# Altium PCB PCBcirc1.PcbDoc
Units mm, origin at the board's own origin, x right, y up, seen from the top; angles counter-clockwise.
Board outline 100 x 50 mm, 2 copper layers (Top Layer, Bottom Layer); 34 components, 25 nets, 90 pads, 2 vias.
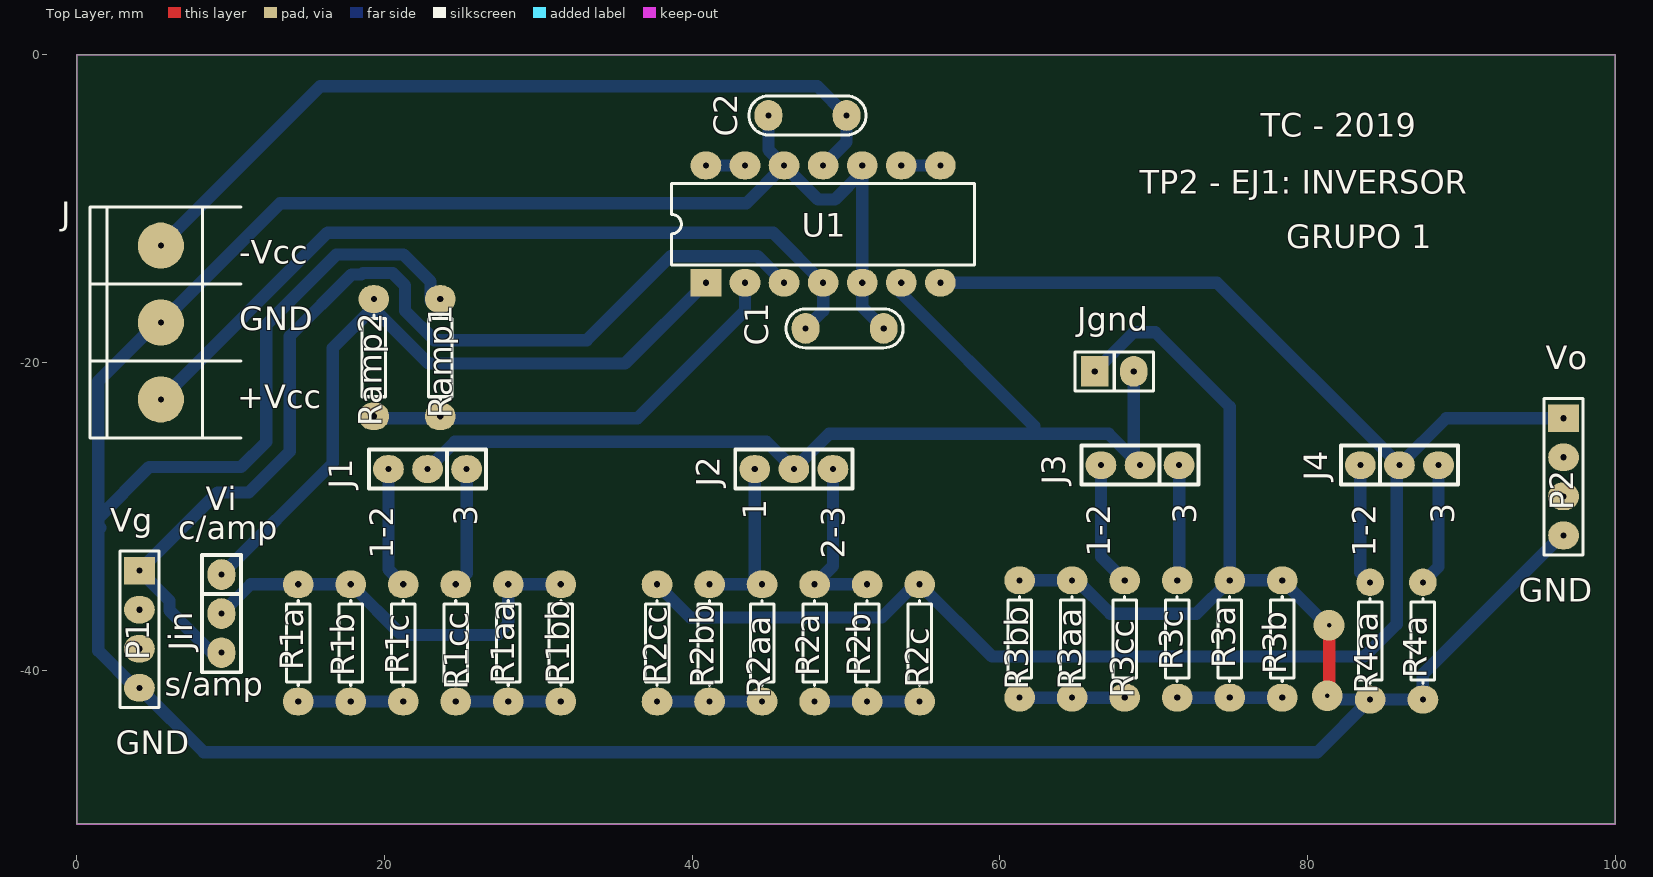
[diagram p0: Top Layer view]
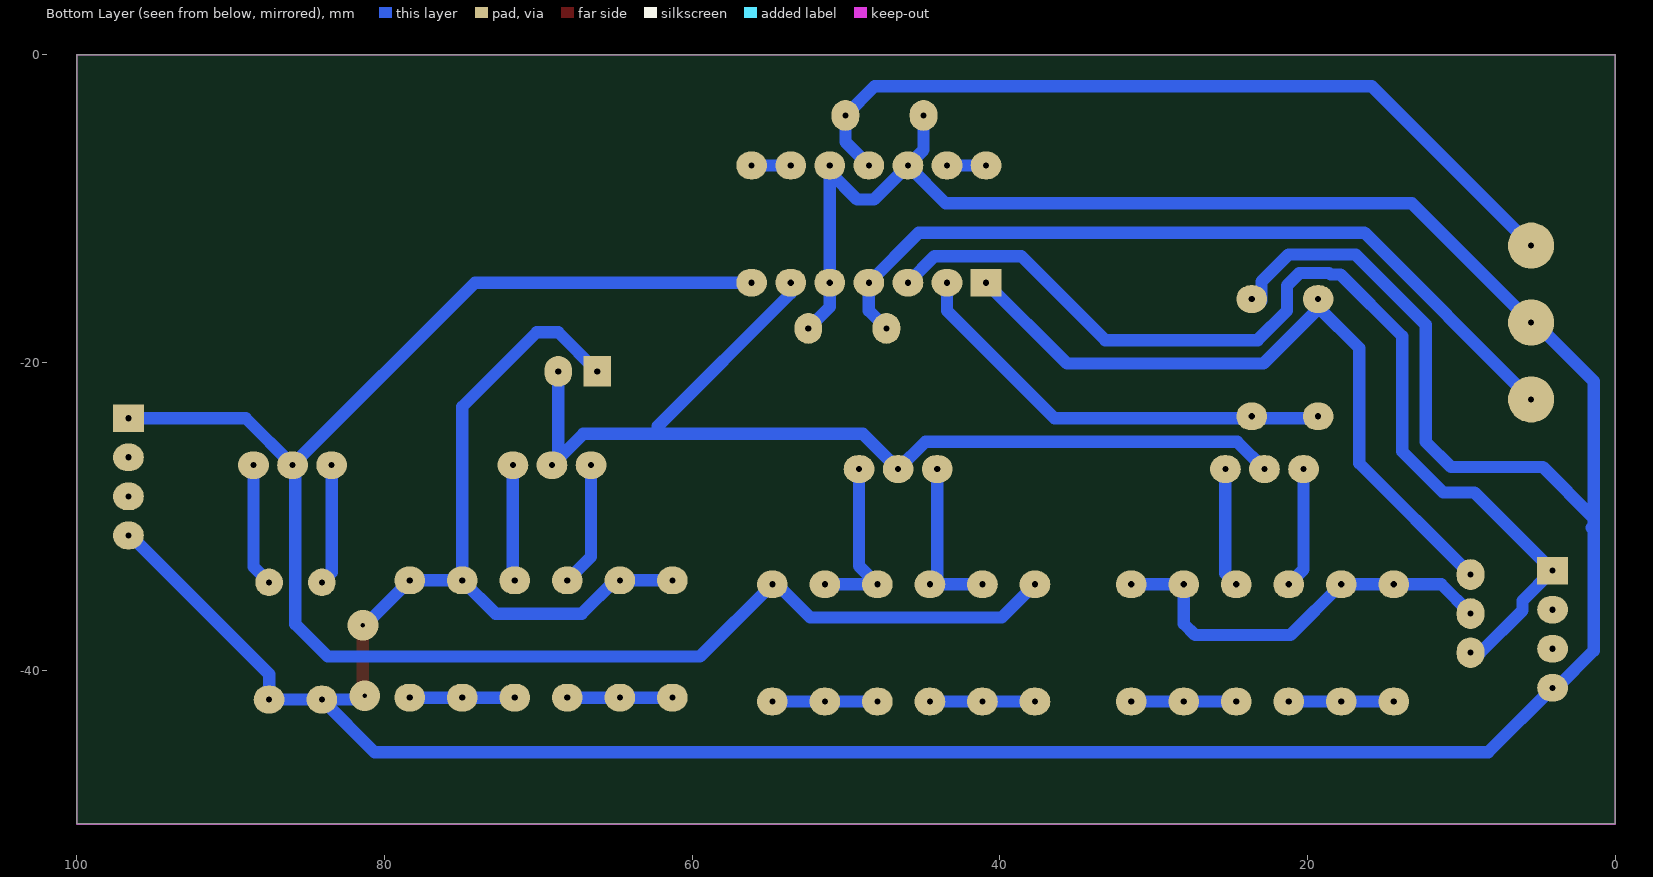
[diagram p1: Bottom Layer view, seen from below]

## Layer stack, top to bottom
Top Solder: solder mask 0.0102, Solder Resist, Dk 3.5
Top Layer: signal copper 0.0356
Dielectric 1: dielectric 0.32, FR-4, Dk 4.8
Bottom Layer: signal copper 0.0356
Bottom Solder: solder mask 0.0102, Solder Resist, Dk 3.5

## Board outline
0,0 100,0 100,-50 0,-50

## Design rules (kind name [scope] priority, off if disabled: settings)
Clearance [All] p1: gap=0.4 ignorepadtopadclearanceinfootprint=FALSE except(0: Arc-Hole Track-Hole SMDPad-Hole THPad-Hole Via-Hole Fill-Hole Poly-Hole Region-Hole Text-Hole)
PolygonConnect [All] p1: connectstyle=Relief reliefconductorwidth=0.254 reliefentries=4 polygonreliefangle="90 Angle" airgapwidth=0.254
RoutingVias [All] p1: holewidth=0.3 width=2 viastyle="Through Hole" minholewidth=0.3 minwidth=1.5 maxholewidth=0.5 maxwidth=2
SolderMaskExpansion [All] p1: expansion=0.102
Width [All] p1: maxlimit=0.9 minlimit=0.6 preferedwidth=0.8
30 further rules are at their usual default settings.

## Components (designator, comment, footprint, x,y, rotation, side; value= is the part's Value field where it differs from the comment)
C1 "CAP" CAP200 49.911,-17.78 r0 top
C2 "CAP" CAP200 47.498,-3.937 r180 top
J "ALIMENTACION" BORNERA3 5.461,-17.399 r0 top
J1 "JUMPER" JUMPER3TH 25.336,-26.924 r270 top
J2 "JUMPER" JUMPER3TH 49.149,-26.924 r270 top
J3 "JUMPER" JUMPER3TH 71.655,-26.67 r270 top
J4 "JUMPER" JUMPER3TH 83.439,-26.67 r90 top
Jgnd "JUMPER" JUMPER2 67.437,-20.574 r0 top
Jin "JUMPER" JUMPER3TH 9.398,-33.782 r0 top (schematic designator Ja)
P1 "Header 4" HDR1X4 4.064,-33.528 r270 top
P2 "Header 4" HDR1X4 96.647,-23.622 r270 top
R1a "Res1" AXIAL-0.3#1 14.388,-38.227 r270 top value=4.7K
R1aa "Res1" AXIAL-0.3#1 28.045,-38.227 r270 top value=4.7K
R1b "Res1" AXIAL-0.3#1 17.802,-38.227 r270 top value=4.7K
R1bb "Res1" AXIAL-0.3#1 31.459,-38.227 r270 top value=4.7K
R1c "Res1" AXIAL-0.3#1 21.216,-38.227 r90 top value=150
R1cc "Res1" AXIAL-0.3#1 24.631,-38.227 r90 top value=150
R2a "Res1" AXIAL-0.3#1 47.961,-38.227 r270 top value=47K
R2aa "Res1" AXIAL-0.3#1 44.547,-38.227 r270 top value=47K
R2b "Res1" AXIAL-0.3#1 51.375,-38.227 r270 top value=47K
R2bb "Res1" AXIAL-0.3#1 41.133,-38.227 r270 top value=47K
R2c "Res1" AXIAL-0.3#1 54.789,-38.227 r90 top value=1.5K
R2cc "Res1" AXIAL-0.3#1 37.719,-38.227 r90 top value=1.5K
R3a "Res1" AXIAL-0.3#1 74.945,-37.973 r270 top value=4.7K
R3aa "Res1" AXIAL-0.3#1 64.703,-37.973 r270 top value=4.7K
R3b "Res1" AXIAL-0.3#1 78.359,-37.973 r270 top value=4.7K
R3bb "Res1" AXIAL-0.3#1 61.289,-37.973 r270 top value=4.7K
R3c "Res1" AXIAL-0.3#1 71.531,-37.973 r90 top value=150
R3cc "Res1" AXIAL-0.3#1 68.117,-37.973 r90 top value=150
R4a "Res1" AXIAL-0.3#2 87.503,-38.1 r90 top value=10K
R4aa "Res1" AXIAL-0.3#2 84.074,-38.1 r90 top value=10K
Ramp1 "Res1" AXIAL-0.3#1 23.622,-19.685 r270 top value=x
Ramp2 "Res1" AXIAL-0.3#1 19.304,-19.685 r90 top value=x
U1 "LM324N" N014 48.514,-10.999 r0 top

## Footprints (in the part's own frame and the unit in brackets; to place one, negate y for a bottom-side part, rotate by r counter-clockwise, add the part's x,y. Pads: shape width x height; smd on the part's side, far side on the other; paste and mask are expansions set on the pad)
AXIAL-0.3#1 [mm] "Axial Device, Thru-Hole; 2 Leads; 0.3 in Pin Spacing"
  oval 1.8x2 hole 0.4: 1(-3.81,0) 2(3.81,0)
  silkscreen extent -2.77,-0.76 2.77,0.76
AXIAL-0.3#2 [mm] "Axial Device, Thru-Hole; 2 Leads; 0.3 in Pin Spacing"
  oval 1.8x2 hole 0.4: 1(-3.81,0)
  round 1.8 hole 0.4: 2(3.81,0)
  silkscreen extent -2.77,-0.76 2.77,0.76
BORNERA3 [mm] "Bornera con Tornillos 5mm separación"
  round 3 hole 0.4: 1(0,5) 2(0,0) 3(0,-5)
  silkscreen extent -4.6,-7.5 5.2,7.5, body extent -3.76,-7.39 3.94,8.11, height 10.05
CAP200 [mm]
  oval 1.8x2 hole 0.4: 1(-2.54,0) 2(2.54,0)
  silkscreen extent -3.81,-1.27 3.81,1.27, body extent -2.79,-1.17 2.79,1.12, height 6.24
HDR1X4 [mm] "Connector; Header; 4 Position"
  rect 1.8x2 hole 0.4: 1(0,0)
  oval 1.8x2 hole 0.4: 2(2.54,0) 3(5.08,0) 4(7.62,0)
  silkscreen extent -1.27,-1.27 8.89,1.27
JUMPER2 [mm]
  rect 1.8x2 hole 0.4: 1(-1.27,0)
  oval 1.8x2 hole 0.4: 2(1.27,0)
  silkscreen extent -2.54,-1.27 2.54,1.27, body extent -2.46,-1.27 2.54,1.27, height 9.5
JUMPER3TH [mm]
  oval 1.8x2 hole 0.4: 1(0,0) 2(0,-2.54) 3(0,-5.08)
  silkscreen extent -1.27,-6.35 1.27,1.27, body extent -1.24,-6.35 1.3,1.27, height 8.38
N014 [mm] "DIP; 14 Leads; Row Spacing 7.62 mm; Pitch 2.54 mm"
  rect 2x1.8 hole 0.4: 1(-7.62,-3.81)
  oval 2x1.8 hole 0.4: 2(-5.08,-3.81) 3(-2.54,-3.81) 4(0,-3.81) 5(2.54,-3.81) 6(5.08,-3.81) 7(7.62,-3.81) 8(7.62,3.81) 9(5.08,3.81) 10(2.54,3.81) 11(0,3.81) 12(-2.54,3.81) 13(-5.08,3.81) 14(-7.62,3.81)
  silkscreen extent -9.85,-2.65 9.85,2.65

## Part data
J: library part "BORNERA 3"
J1 J2 J3 J4 Jin: library part JUMPER3TH, "TIRA DE PINES 1x3"
P1 P2: "Header, 4-Pin", LatestRevisionDate=17-Jul-2002, LatestRevisionNote="Re-released for DXP Platform.", Publisher="Altium Limited"
R1a R1aa R1b R1bb R1c R1cc R2a R2aa R2b R2bb R2c R2cc R3a R3aa R3b R3bb R3c R3cc R4a R4aa Ramp1 Ramp2: "Resistor", LatestRevisionDate=17-Jul-2002, LatestRevisionNote="Re-released for DXP Platform.", PackageDescription="Axial Device, Thru-Hole; 2 Leads; 0.3 in Pin Spacing", PackageReference=AXIAL-0.3, Published=8-Jun-2000, Publisher="Altium Limited"
U1: "Quadruple Operational Amplifier", ComponentLink1Description="Manufacturer Link", ComponentLink1URL=http://www.ti.com/, ComponentLink2Description=Datasheet, ComponentLink2URL=http://www-s.ti.com/sc/ds/lm324.pdf, DatasheetVersion=Feb-1997, LatestRevisionDate=04-Mar-2005, LatestRevisionNote="Stylized 3D Model Added.", PackageDescription="DIP; 14 Leads; Row Spacing 7.62 mm; Pitch 2.54 mm", PackageReference=N014, PackageVersion=Oct-1995, Published=16-Jan-2001, Publisher="Altium Limited"

## Via types
v1: diameter 2, hole 0.3, Top Layer to Bottom Layer, 2 vias

## Nets (pads, with @x,y where several pads share a name; then routed paths per layer and width w, separated by ;. In a path a pad name is that pad's centre, name@x,y a point inside that pad or via, vN(x,y) a via of type N, cw(c..) or ccw(c..) an arc to the next point about the centre after c; other vN are vias at no path point)
+Vcc: C1.1 J.3 U1.4 | length 52.3
  Bottom Layer w0.8: J.3 16.303,-11.557 45.262,-11.557 U1.4 48.514,-16.637 C1.1
-Vcc: C2.1 J.1 U1.11 | length 53.5
  Bottom Layer w0.8: J.1 15.828,-2.032 48.133,-2.032 C2.1 50.038,-5.665 U1.11
GND: C1.2 C2.2 J.2 Jgnd.1 P1.4 P2.4 R3a.1 R3aa.1 R3b.1 R3bb.1 R4a.1 R4aa.1 Ramp1.1 U1.5 U1.10 U1.12 | length 283.4
  Top Layer w0.8: v1(81.28,-41.656) 81.407,-41.529 v1(81.407,-37.084)
  Bottom Layer w0.8: 1.524,-30.734 1.397,-30.861 ; Ramp1.1@22.987,-16.002 22.987,-14.732 21.23,-12.975 16.87,-12.975 12.319,-17.526 12.319,-25.146 10.668,-26.797 4.699,-26.797 1.397,-30.099 ; C2.2 44.958,-6.173 U1.12 ; U1.10 U1.10@51.054,-7.62 ; C1.2 51.054,-16.383 U1.5 U1.10@51.054,-7.62 ; R3bb.1 R3aa.1 65.024,-34.163 67.183,-36.322 72.786,-36.322 R3a.1 ; Jgnd.1 68.707,-18.034 70.104,-18.034 74.945,-22.875 R3a.1 ; v1(81.28,-41.656) 81.534,-41.91 R4aa.1 ; v1(81.407,-37.084) 81.28,-37.084 R3b.1 R3a.1 ; P2.4 96.52,-31.242 87.503,-40.259 R4a.1 R4aa.1 ; 1.397,-30.861 1.397,-38.735 3.81,-41.148 P1.4 8.255,-45.339 80.645,-45.339 R4aa.1 ; 1.397,-30.861 1.397,-30.099 ; 1.397,-30.099 1.397,-21.209 5.207,-17.399 J.2 13.208,-9.652 43.511,-9.652 U1.12 ; U1.12 48.183,-9.398 49.276,-9.398 U1.10@51.054,-7.62
NetJ1_1: J1.1 R1cc.2 | length 7.8
  Bottom Layer w0.8: R1cc.2 25.336,-33.711 J1.1
NetJ1_2: J1.2 J2.2 J3.2 Jgnd.2 U1.6 | length 68.2
  Bottom Layer w0.8: J1.2 24.575,-25.146 44.831,-25.146 J2.2 48.895,-24.638 67.083,-24.638 J3.2@68.707,-26.262 ; U1.6 53.594,-15.494 62.23,-24.13 ; Jgnd.2 J3.2@68.707,-26.262 ; J3.2 J3.2@68.707,-26.262
NetJ1_3: J1.3 R1c.2 | length 7.9
  Bottom Layer w0.8: J1.3 20.256,-33.457 R1c.2
NetJ2_1: J2.1 R2a.1 R2b.1 | length 11.4
  Bottom Layer w0.8: J2.1 49.149,-33.229 R2a.1 R2b.1
NetJ2_3: J2.3 R2aa.1 R2bb.1 | length 11.1
  Bottom Layer w0.8: R2bb.1 R2aa.1 44.069,-33.939 J2.3
NetJ3_1: J3.1 R3c.2 | length 7.5
  Bottom Layer w0.8: R3c.2 71.655,-34.039 J3.1
NetJ3_3: J3.3 R3cc.2 | length 8.1
  Bottom Layer w0.8: J3.3 66.575,-32.621 R3cc.2
NetJ4_1: J4.1 R4aa.2 | length 7.9
  Bottom Layer w0.8: J4.1 83.439,-33.655 R4aa.2
NetJ4_3: J4.3 R4a.2 | length 8
  Bottom Layer w0.8: R4a.2 88.519,-33.274 J4.3
NetR1a_2: R1a.2 R1b.2 R1c.1 | length 6.8
  Bottom Layer w0.8: R1a.2 R1b.2 R1c.1
NetR1aa_2: R1aa.2 R1bb.2 R1cc.1 | length 6.8
  Bottom Layer w0.8: R1cc.1 R1aa.2 R1bb.2
NetR2a_2: R2a.2 R2b.2 R2c.1 | length 6.8
  Bottom Layer w0.8: R2a.2 R2b.2 R2c.1
NetR2aa_2: R2aa.2 R2bb.2 R2cc.1 | length 6.8
  Bottom Layer w0.8: R2cc.1 R2bb.2 R2aa.2
NetR3a_2: R3a.2 R3b.2 R3c.1 | length 6.8
  Bottom Layer w0.8: R3c.1 R3a.2 R3b.2
NetR3aa_2: R3aa.2 R3bb.2 R3cc.1 | length 6.8
  Bottom Layer w0.8: R3bb.2 R3aa.2 R3cc.1
NetRamp1_2: Ramp1.2 Ramp2.1 U1.2 | length 28.5
  Bottom Layer w0.8: Ramp2.1@19.812,-23.495 19.939,-23.622 36.449,-23.622 43.434,-16.637 U1.2 U1.2@43.434,-14.692
NetU1_8: U1.8 U1.9 | length 2.5
  Bottom Layer w0.8: U1.9 U1.8
NetU1_13: U1.13 U1.14 | length 2.5
  Bottom Layer w0.8: U1.14 U1.13
Vamp: Jin.1 Ramp2.2 U1.1 | length 47.5
  Bottom Layer w0.8: Jin.1 16.637,-26.543 16.637,-19.05 Ramp2.2@19.241,-16.447 ; Ramp2.2@18.923,-16.129 Ramp2.2@19.241,-16.447 ; Ramp2.2@19.431,-16.256 Ramp2.2@19.241,-16.447 ; U1.1 35.637,-20.066 22.86,-20.066 Ramp2.2@19.241,-16.447
Vg: Jin.3 P1.1 U1.3 | length 68
  Bottom Layer w0.8: Jin.3 8.763,-38.862 6.018,-36.117 6.018,-35.482 P1.1 9.144,-28.448 11.176,-28.448 13.843,-25.781 13.843,-18.288 17.85,-14.281 18.494,-14.281 18.6,-14.175 20.525,-14.175 21.336,-14.986 21.336,-16.637 23.241,-18.542 33.147,-18.542 38.608,-13.081 44.246,-13.081 U1.3
Vin: Jin.2 R1a.1 R1aa.1 R1b.1 R1bb.1 | length 27.1
  Bottom Layer w0.8: Jin.2 11.303,-34.417 R1a.1 R1b.1 21.104,-37.719 27.305,-37.719 28.045,-36.979 R1aa.1 R1bb.1
Vout: J4.2 P2.1 R2c.2 R2cc.2 U1.7 | length 109.8
  Bottom Layer w0.8: R2cc.2 39.878,-36.576 52.324,-36.576 54.483,-34.417 R2c.2 59.488,-39.116 83.693,-39.116 85.803,-37.006 85.803,-26.846 J4.2 ; U1.7 74.118,-14.809 J4.2 ; P2.1 89.027,-23.622 J4.2
pads on no net: P1.2 P1.3 P2.2 P2.3

## Keep-outs
Keep-Out Layer:
  the board outline again, w0.1

## Silkscreen, mask and mechanical layers (free items; w line width, h text height)
Top Overlay:
  text "TC - 2019" at 76.962,-5.334 h1.52
  text "TP2 - EJ1: INVERSOR" at 69.088,-9.017 h1.52
  text "GRUPO 1" at 78.613,-12.573 h1.52
  text "-Vcc" at 10.541,-13.589 h1.52
  text "GND" at 10.541,-17.907 h1.52
  text "Vo" at 95.504,-20.447 h1.52
  text "+Vcc" at 10.414,-22.987 h1.52
  text "Vi" at 8.382,-29.591 h1.52
  text "1" at 44.831,-30.226 h1.52 r90
  text "3" at 72.771,-30.48 h1.52 r90
  text "3" at 89.535,-30.48 h1.52 r90
  text "3" at 26.035,-30.607 h1.52 r90
  text "Vg" at 2.159,-30.988 h1.52
  text "c/amp" at 6.604,-31.496 h1.52
  text "1-2" at 67.183,-32.639 h1.52 r90
  text "1-2" at 84.455,-32.639 h1.52 r90
  text "1-2" at 20.574,-32.766 h1.52 r90
  text "2-3" at 49.911,-32.766 h1.52 r90
  text "GND" at 93.726,-35.56 h1.52
  text "s/amp" at 5.715,-41.656 h1.52
  text "GND" at 2.54,-45.466 h1.52